# Altium PCB IrrigationStation_V2R1.PcbDoc
Units mm, origin at the board's own origin, x right, y up, seen from the top; angles counter-clockwise.
Board outline 93.47 x 97.79 mm, 2 copper layers (Top Layer, Bottom Layer); 63 components, 47 nets, 212 pads, 0 vias.
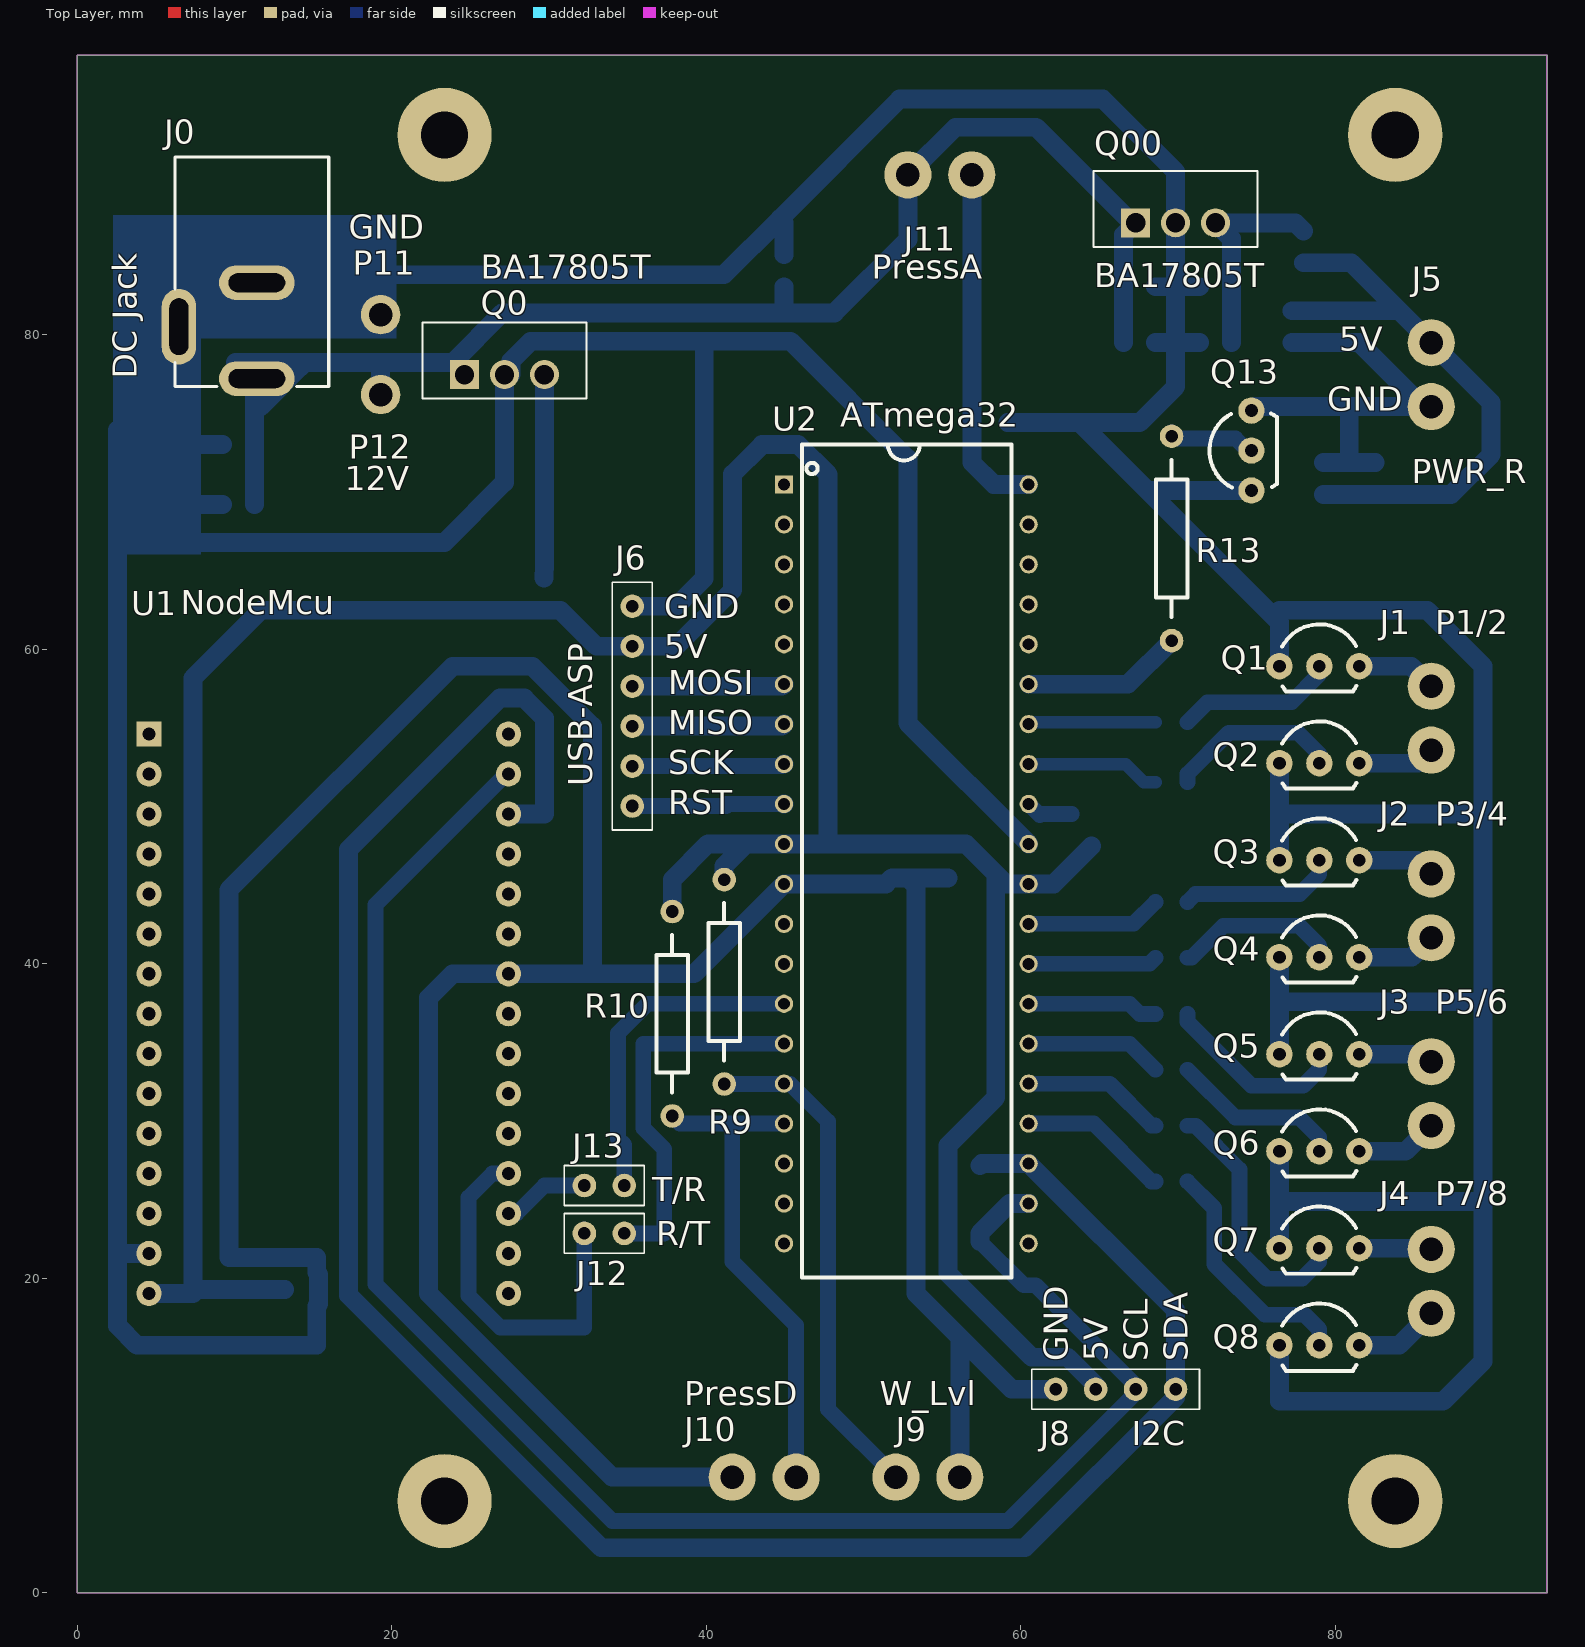
[diagram p0: Top Layer view]
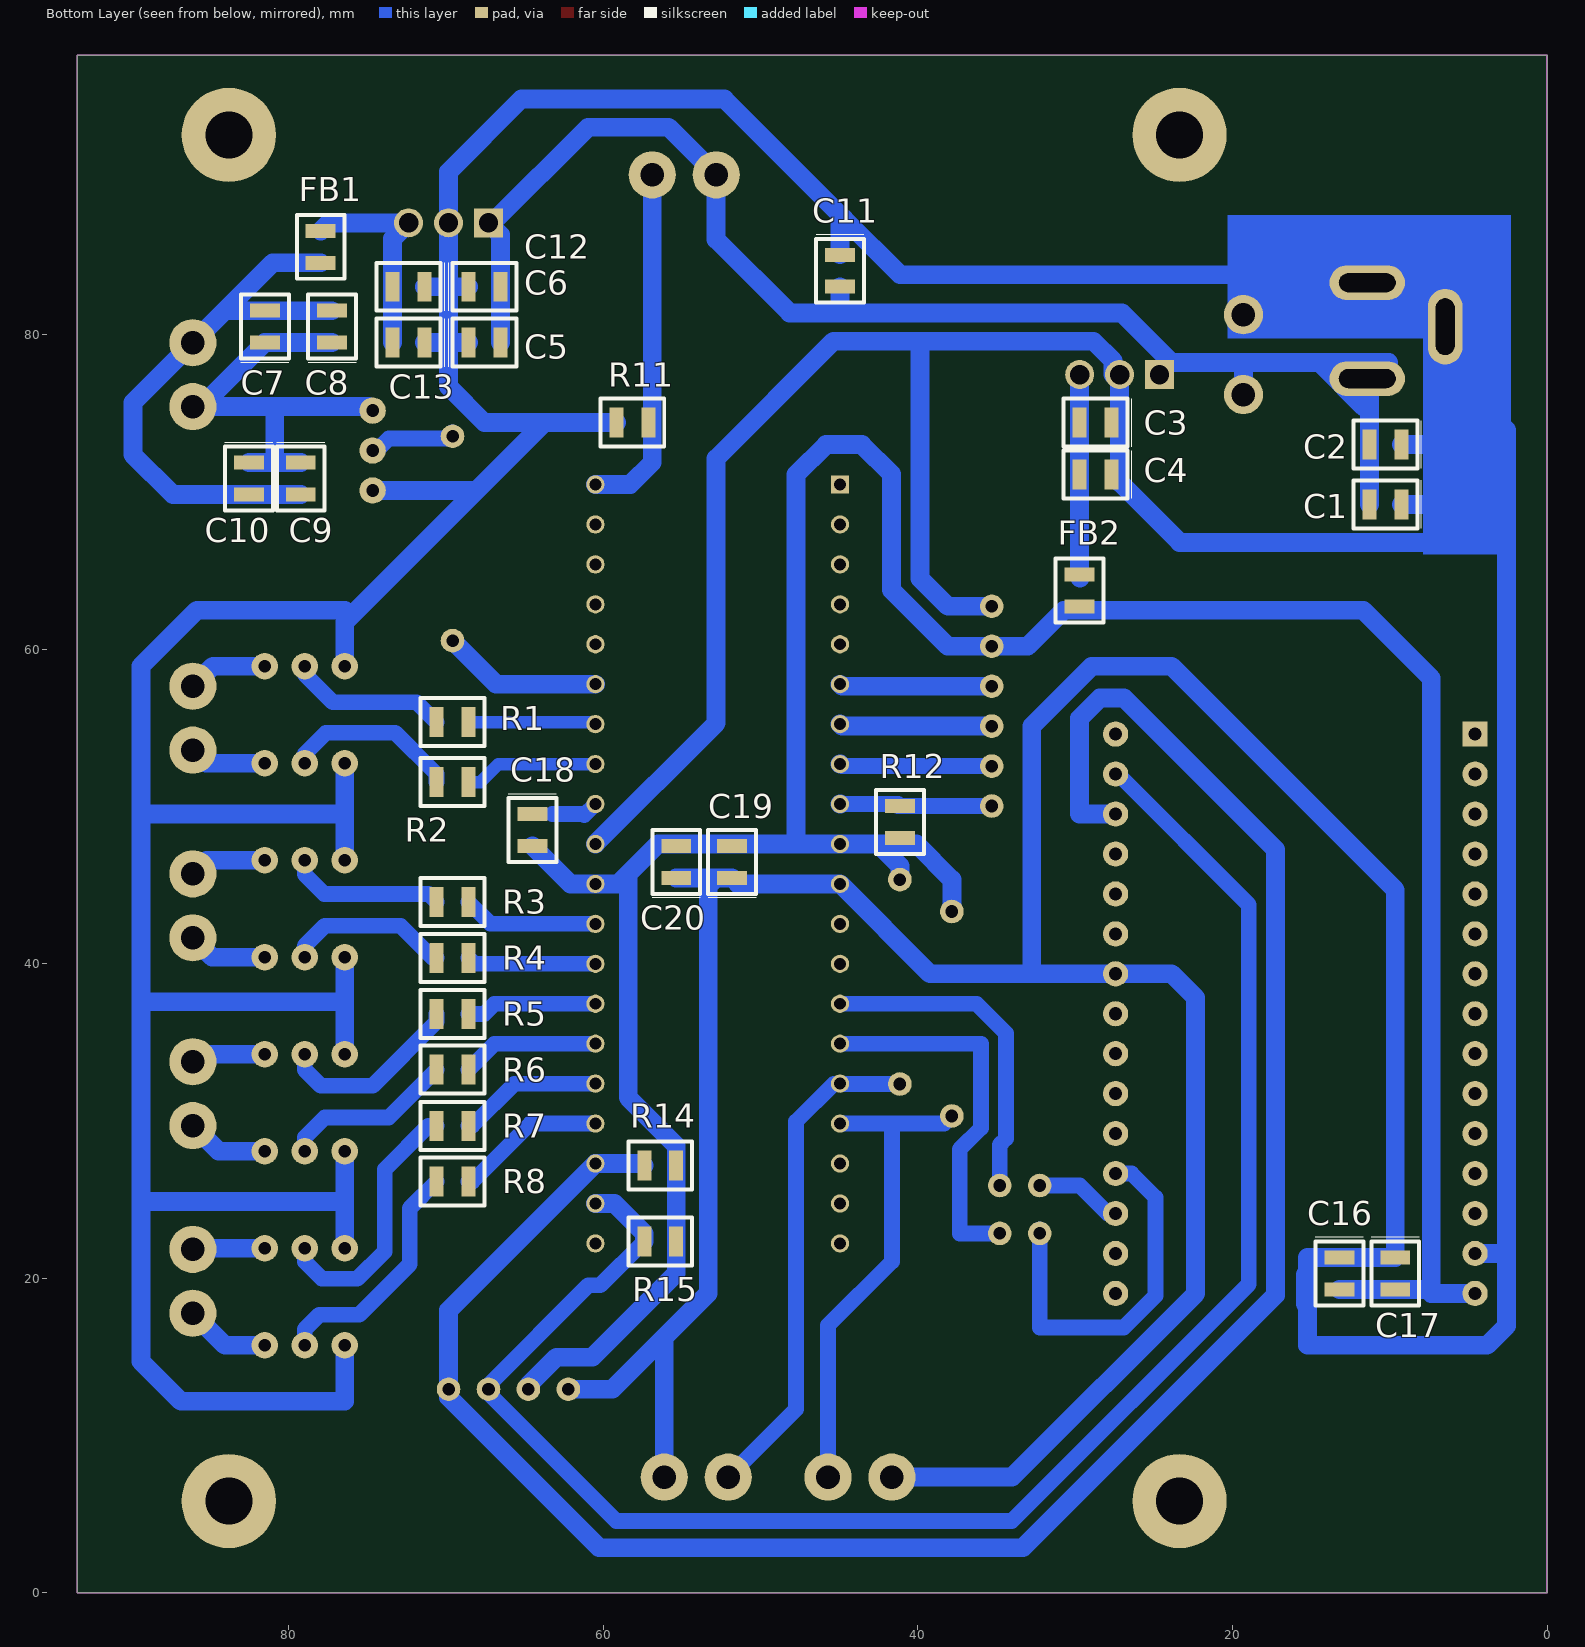
[diagram p1: Bottom Layer view, seen from below]
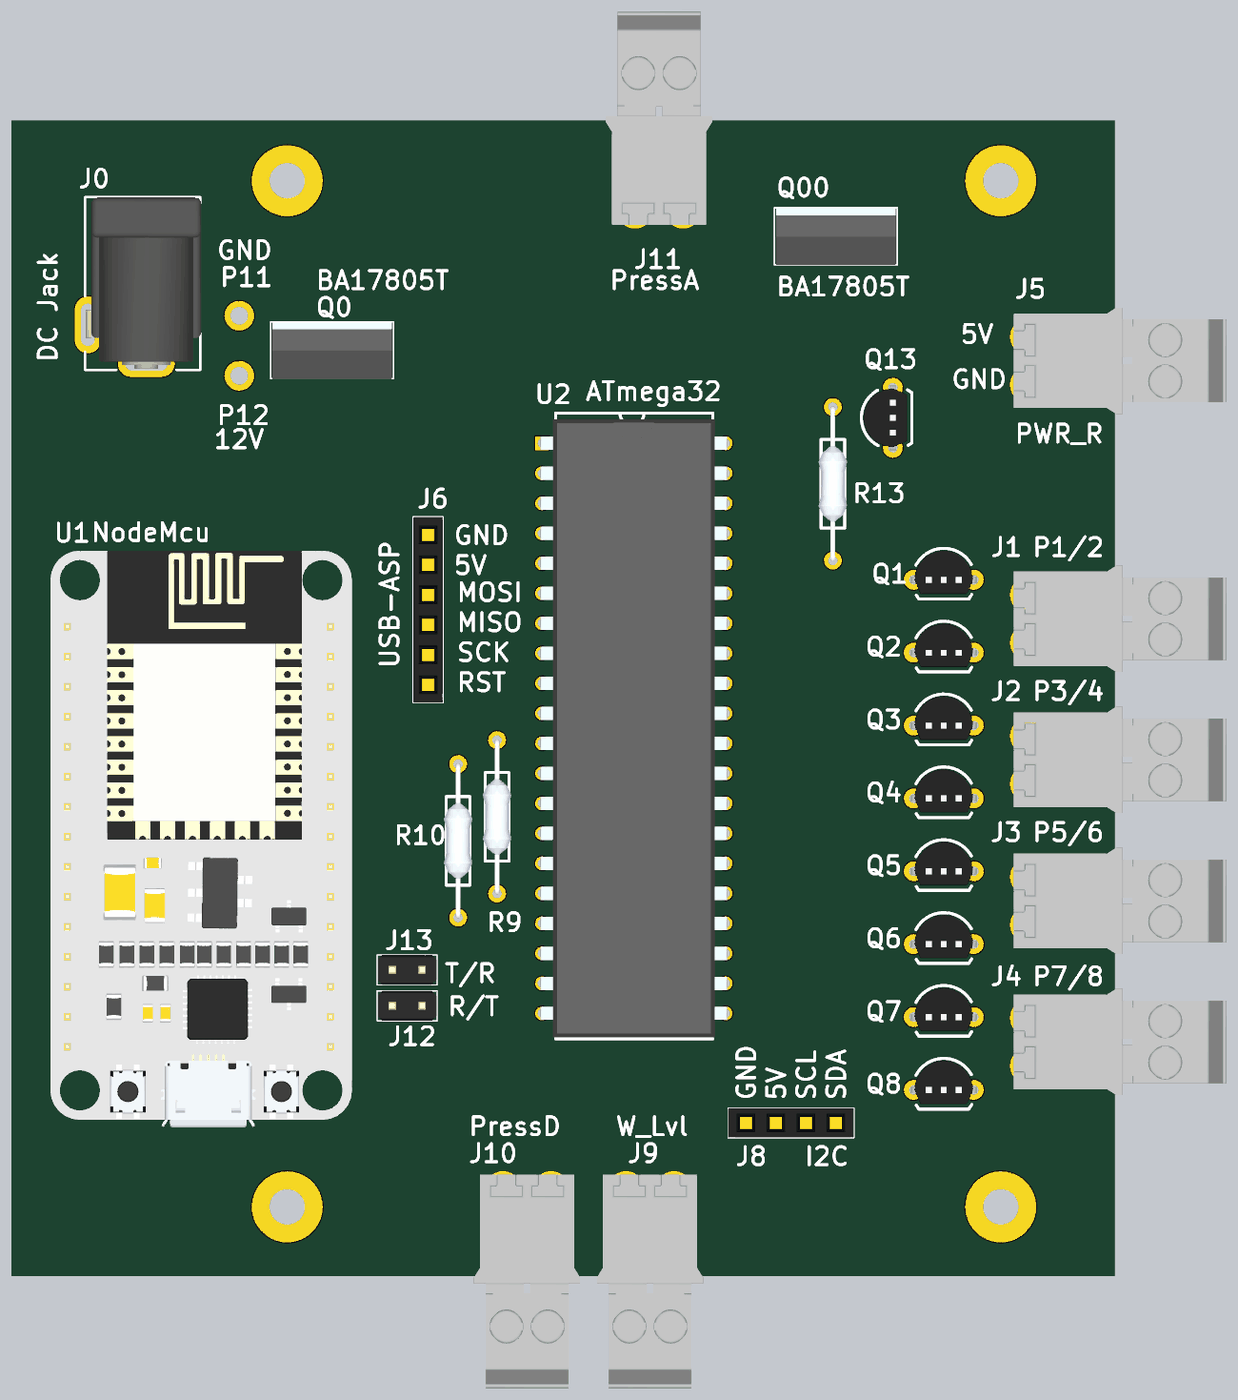
[diagram p2: 3D render of the assembled board from above, using the file's embedded part models]
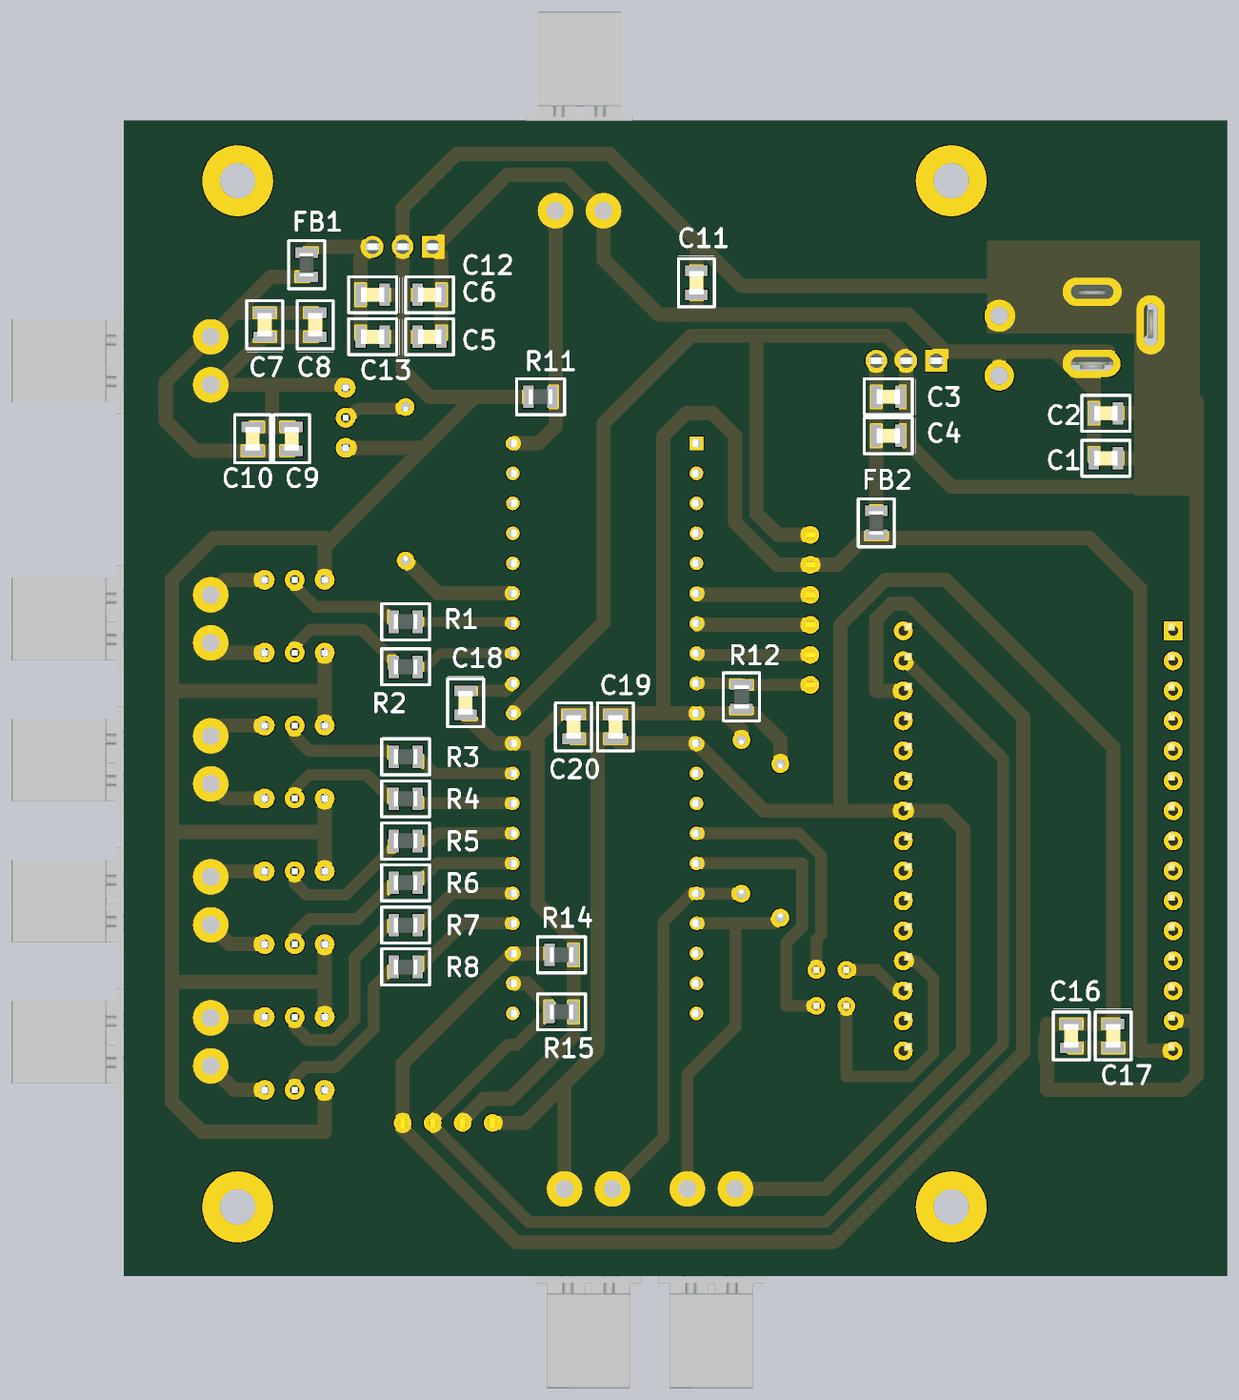
[diagram p3: 3D render of the assembled board from below, using the file's embedded part models]

## Layer stack, top to bottom
Top Solder: solder mask 0.0102, Solder Resist, Dk 3.5
Top Layer: signal copper 0.0356
Dielectric 1: dielectric 0.32, FR-4, Dk 4.8
Bottom Layer: signal copper 0.0356
Bottom Solder: solder mask 0.0102, Solder Resist, Dk 3.5

## Board outline
0,0 93.472,0 93.472,97.79 0,97.79

## Design rules (kind name [scope] priority, off if disabled: settings)
Clearance [All] p1: gap=0.6 ignorepadtopadclearanceinfootprint=TRUE except(0: Arc-Hole Track-Hole SMDPad-Hole THPad-Hole Via-Hole Fill-Hole Poly-Hole Region-Hole Text-Hole)
HoleSize [All] p1: absolutevalues=TRUE maxlimit=4 minlimit=0.5 maxpercent=80.000 minpercent=20.000
PolygonConnect [All] p1: connectstyle=Direct reliefconductorwidth=0.254 reliefentries=4 polygonreliefangle="45 Angle" airgapwidth=0.254
RoutingLayers [All] p1: top layer_v5=FALSE bottom layer_v5=TRUE
RoutingVias [All] p1: holewidth=0.711 width=1.27 viastyle="Through Hole" minholewidth=0.711 minwidth=1.27 maxholewidth=0.711 maxwidth=1.27
SolderMaskExpansion [All] p1: expansion=0.102
Width [All] p1: maxlimit=1.2 minlimit=0.6 preferedwidth=0.6
28 further rules are at their usual default settings.

## Components (designator, comment, footprint, x,y, rotation, side; value= is the part's Value field where it differs from the comment)
C1 "Capacitor - Polarized" "Capacitor - SMD - 0805 - pol" 10.274,69.215 r180 bottom value=1uF
C2 "Capacitor - Polarized" "Capacitor - SMD - 0805 - pol" 10.274,73.025 r180 bottom value=10uF
C3 "Capacitor - Polarized" "Capacitor - SMD - 0805 - pol" 28.702,74.422 r180 bottom value=10uF
C4 "Capacitor - Polarized" "Capacitor - SMD - 0805 - pol" 28.702,71.12 r180 bottom value=1uF
C5 "Capacitor - Polarized" "Capacitor - SMD - 0805 - pol" 67.564,79.502 r0 bottom value=10uF
C6 "Capacitor - Polarized" "Capacitor - SMD - 0805 - pol" 67.564,83.058 r0 bottom value=1uF
C7 "Capacitor - Polarized" "Capacitor - SMD - 0805 - pol" 81.534,80.518 r270 bottom value=10uF
C8 "Capacitor - Polarized" "Capacitor - SMD - 0805 - pol" 77.252,80.518 r270 bottom value=10uF
C9 "Capacitor - Polarized" "Capacitor - SMD - 0805 - pol" 79.248,70.866 r90 bottom value=10uF
C10 "Capacitor - Polarized" "Capacitor - SMD - 0805 - pol" 82.55,70.866 r90 bottom value=10uF
C11 "Capacitor - Polarized" "Capacitor - SMD - 0805 - pol" 44.958,84.074 r90 bottom value=1uF
C12 "Capacitor - Polarized" "Capacitor - SMD - 0805 - pol" 72.39,83.058 r180 bottom value=10uF
C13 "Capacitor - Polarized" "Capacitor - SMD - 0805 - pol" 72.39,79.502 r180 bottom value=1uF
C16 "Capacitor - Polarized" "Capacitor - SMD - 0805 - pol" 13.208,20.32 r90 bottom value=10uF
C17 "Capacitor - Polarized" "Capacitor - SMD - 0805 - pol" 9.652,20.32 r90 bottom value=1uF
C18 "Capacitor - Polarized" "Capacitor - SMD - 0805 - pol" 64.516,48.514 r90 bottom value=1uF
C19 "Capacitor - Polarized" "Capacitor - SMD - 0805 - pol" 51.816,46.482 r270 bottom value=10uF
C20 "Capacitor - Polarized" "Capacitor - SMD - 0805 - pol" 55.372,46.482 r270 bottom value=1uF
FB1 "Ferrite Bead" "Coil - SMD - 0805" 77.978,85.598 r90 bottom value=100mH
FB2 "Ferrite Bead" "Coil - SMD - 0805" 29.718,63.754 r90 bottom value=100mH
J0 "DC Jack" "DC Jack - KLDHCX" 11.176,80.645 r270 top
J1 "P1/2" "Terminal Block,2 Pos, 4mm" 86.106,55.626 r90 top
J2 "P3/4" "Terminal Block,2 Pos, 4mm" 86.106,43.688 r90 top
J3 "P5/6" "Terminal Block,2 Pos, 4mm" 86.106,31.75 r90 top
J4 "P7/8" "Terminal Block,2 Pos, 4mm" 86.106,19.812 r90 top
J5 "PWR_R" "Terminal Block,2 Pos, 4mm" 86.106,77.47 r90 top
J6 "USB-ASP" "Header Female 6 - 2.54" 35.306,62.738 r0 top
J8 "I2C" "Header Female 4 - 2.54" 69.85,12.954 r270 top
J9 "W_Lvl" "Terminal Block,2 Pos, 4mm" 54.102,7.366 r0 top
J10 "PressD" "Terminal Block,2 Pos, 4mm" 43.688,7.366 r0 top
J11 "PressA" "Terminal Block,2 Pos, 4mm" 54.864,90.17 r180 top
J12 "R/T" "Header Male 2 - 2.54" 34.798,22.86 r270 top
J13 "T/R" "Header Male 2 - 2.54" 34.798,25.908 r270 top
P11 "GND" "Pin - TH 1.5mm" 19.304,81.28 r180 top
P12 "12V" "Pin - TH 1.5mm" 19.304,76.2 r180 top
Q0 "BA17805T" TO254P480X1010X2280-3P 24.638,77.47 r0 top value=7805
Q00 "BA17805T" TO254P480X1010X2280-3P 67.31,87.122 r0 top value=7805
Q1 "P2N2222A" TO92 78.994,58.928 r0 top value=2N222
Q2 "P2N2222A" TO92 78.994,52.759 r0 top value=2N222
Q3 "P2N2222A" TO92 78.994,46.591 r0 top value=2N222
Q4 "P2N2222A" TO92 78.994,40.422 r0 top value=2N222
Q5 "P2N2222A" TO92 78.994,34.254 r0 top value=2N222
Q6 "P2N2222A" TO92 78.994,28.085 r0 top value=2N222
Q7 "P2N2222A" TO92 78.994,21.917 r0 top value=2N222
Q8 "P2N2222A" TO92 78.994,15.748 r0 top value=2N222
Q13 "P2N2222A" TO92 74.676,72.644 r90 top value=2N222
R1 "Resistor" "Resistor - SMD - 0805" 69.596,55.372 r0 bottom value=1KOhm
R2 "Resistor" "Resistor - SMD - 0805" 69.596,51.562 r0 bottom value=1KOhm
R3 "Resistor" "Resistor - SMD - 0805" 69.596,43.942 r0 bottom value=1KOhm
R4 "Resistor" "Resistor - SMD - 0805" 69.596,40.386 r0 bottom value=1KOhm
R5 "Resistor" "Resistor - SMD - 0805" 69.596,36.814 r0 bottom value=1KOhm
R6 "Resistor" "Resistor - SMD - 0805" 69.596,33.274 r0 bottom value=1KOhm
R7 "Resistor" "Resistor - SMD - 0805" 69.596,29.702 r0 bottom value=1KOhm
R8 "Resistor" "Resistor - SMD - 0805" 69.596,26.162 r0 bottom value=1KOhm
R9 "Resistor" "Resistor - TH - 12mm" 41.148,38.862 r90 top value=1KOhm
R10 "Resistor" "Resistor - TH - 12mm" 37.846,36.83 r90 top value=1KOhm
R11 "Resistor" "Resistor - SMD - 0805" 58.166,74.422 r0 bottom value=100Ohm
R12 "Resistor" "Resistor - SMD - 0805" 41.148,49.022 r90 bottom value=10KOhm
R13 "Resistor" "Resistor - TH - 12mm" 69.596,67.056 r90 top value=1KOhm
R14 "Resistor" "Resistor - SMD - 0805" 56.388,27.178 r180 bottom value=1KOhm
R15 "Resistor" "Resistor - SMD - 0805" 56.388,22.352 r180 bottom value=1KOhm
U1 "NodeMcu" DIP2286W64P254L4826H735Q30N 16.002,36.83 r0 top
U2 "ATmega32" DIP1556W56P254L5232H483Q40N 44.955,70.485 r0 top

## Footprints (in the part's own frame and the unit in brackets; to place one, negate y for a bottom-side part, rotate by r counter-clockwise, add the part's x,y. Pads: shape width x height; smd on the part's side, far side on the other; paste and mask are expansions set on the pad)
"Capacitor - SMD - 0805 - pol" [mil] "SMD capacitor - 0805"
  rect 35x75 smd: 1(-40,0) 2(40,0)
  silkscreen extent -80,-60 90,60, body extent -39,-25 39,25, height 32
"Coil - SMD - 0805" [mil] "SMD coil - 0805"
  rect 35x75 smd: 1(-40,0) 2(40,0)
  silkscreen extent -80,-60 80,60, body extent -39,-23 39,24, height 35
"DC Jack - KLDHCX" [mm]
  oval 2.2x4.8 hole 1.2 slot 3.6 at 90 deg: 1(3.429,0.254) 2(-2.667,0.254)
  oval 4.8x2.2 hole 1.2 slot 3.6 at 0 deg: 3(0.127,-4.699)
  silkscreen extent -10.67,-4.95 3.94,4.83, body extent -10.65,-4.9 3.85,4.9, height 11
DIP1556W56P254L5232H483Q40N [mil]
  rect 45.63x45.63 hole 29.88: 1(0,0)
  round 45.63 hole 29.88: 2(0,-100) 3(0,-200) 4(0,-300) 5(0,-400) 6(0,-500) 7(0,-600) 8(0,-700) 9(0,-800) 10(0,-900) 11(0,-1000) 12(0,-1100) 13(0,-1200) 14(0,-1300) 15(0,-1400) 16(0,-1500) 17(0,-1600) 18(0,-1700) 19(0,-1800) 20(0,-1900) 21(612.52,-1900) 22(612.52,-1800) 23(612.52,-1700) 24(612.52,-1600) 25(612.52,-1500) 26(612.52,-1400) 27(612.52,-1300) 28(612.52,-1200) 29(612.52,-1100) 30(612.52,-1000) 31(612.52,-900) 32(612.52,-800) 33(612.52,-700) 34(612.52,-600) 35(612.52,-500) 36(612.52,-400) 37(612.52,-300) 38(612.52,-200) 39(612.52,-100) 40(612.52,0)
  silkscreen extent 45,-1985 570,100, body extent -5,-1980 618,80, height 190
DIP2286W64P254L4826H735Q30N [mm]
  rect 1.6x1.6 hole 0.835: 1(-11.43,17.78)
  round 1.6 hole 0.835: 2(-11.43,15.24) 3(-11.43,12.7) 4(-11.43,10.16) 5(-11.43,7.62) 6(-11.43,5.08) 7(-11.43,2.54) 8(-11.43,0) 9(-11.43,-2.54) 10(-11.43,-5.08) 11(-11.43,-7.62) 12(-11.43,-10.16) 13(-11.43,-12.7) 14(-11.43,-15.24) 15(-11.43,-17.78) 16(11.43,-17.78) 17(11.43,-15.24) 18(11.43,-12.7) 19(11.43,-10.16) 20(11.43,-7.62) 21(11.43,-5.08) 22(11.43,-2.54) 23(11.43,0) 24(11.43,2.54) 25(11.43,5.08) 26(11.43,7.62) 27(11.43,10.16) 28(11.43,12.7) 29(11.43,15.24) 30(11.43,17.78)
  body extent -12.7,-24.25 12.85,24.57, height 12.85
"Header Female 4 - 2.54" [mm] "header - 4 pin - pitch 2.54mm"
  round 1.5 hole 0.8: 1(0,0) 2(0,-2.54) 3(0,-5.08) 4(0,-7.62)
  silkscreen extent -1.27,-9.14 1.27,1.52, body extent -1.25,-9.14 1.25,1.52, height 5
"Header Female 6 - 2.54" [mm] "header - 6 pin - pitch 2.54mm"
  round 1.5 hole 0.8: 1(0,0) 2(0,-2.54) 3(0,-5.08) 4(0,-7.62) 5(0,-10.16) 6(0,-12.7)
  silkscreen extent -1.27,-14.22 1.27,1.52, body extent -1.25,-14.22 1.25,1.52, height 5
"Header Male 2 - 2.54" [mm] "header - 2 pin - pitch 2.54mm"
  round 1.5 hole 0.8: 1(0,0) 2(0,-2.54)
  silkscreen extent -1.27,-3.81 1.27,1.27, body extent -1.27,-3.77 1.28,1.23, height 10.54
"Pin - TH 1.5mm" [mm] "Through-hole pin - 1.5mm"
  round 2.5 hole 1.5: 1(0,0)
"Resistor - SMD - 0805" [mil] "SMD resistor - 0805"
  rect 35x75 smd: 1(-40,0) 2(40,0)
  silkscreen extent -80,-60 80,60, body extent -39,-25 39,25, height 20
"Resistor - TH - 12mm" [mm] "Through-hole resistor 12mm/0.8mm"
  round 1.5 hole 0.8: 1(-6.5,0) 2(6.5,0)
  silkscreen extent -5,-1 5,1, body extent -6.55,-1.2 6.55,1.2, height 3.9
"Terminal Block,2 Pos, 4mm" [mm] "Terminal Block,2 Pos, 4mm"
  round 3 hole 1.5 paste+0 mask+0: 1(2.032,0) 2(-2.032,0)
  body extent -4.5,-16.85 4.5,1.2, height 8.8
TO92 [mil]
  round 66 hole 32: 1(-100,0) 2(0,0) 3(100,0)
  silkscreen extent -93,-64 93,105, body extent -110,-47 110,98, height 316
TO254P480X1010X2280-3P [mm]
  rect 1.845x1.845 hole 1.23: 1(0,0)
  round 1.845 hole 1.23: 2(2.54,0) 3(5.08,0)
  silkscreen extent -2.67,-1.52 7.75,3.3, body extent -2.51,-1.55 7.59,3.25, height 22.1

## Part data
C1 C2 C3 C4 C5 C6 C7 C8 C9 C10 C11 C12 C13 C16 C17 C18 C19 C20: "Generic Polarized Capacitor"
FB1 FB2: "Generic Ferrite Bead"
J1 J2 J3 J4 J5 J9 J10 J11: library part "TERM BLOCK PLUG 2POS", "2 Position Terminal Block Plug, Female Sockets 180° Free Hanging (In-Line)"
J6: library part "Header 6", "Header - 6 pins"
J8: library part "Header 4", "Header - 4 pins"
J12 J13: library part "Header 2", "Header - 2 pins"
P11 P12: library part Pin, "Single Pin"
Q0 Q00: "Voltage Regulator"
Q1 Q2 Q3 Q4 Q5 Q6 Q7 Q8 Q13: "Transitor - BJT - NPN 40V 600mA 300 MHz 625mW - TO-92-3"
R1 R2 R3 R4 R5 R6 R7 R8 R9 R10 R11 R12 R13 R14 R15: "Generic Resistor"
U1: "ESP32 NodeMCU"
U2: library part ATMEGA32-16PU, "AVR ATmega Microcontroller IC 8-Bit 16MHz 32KB _16K x 16_ FLASH 40-PDIP"

## Free pads (board coordinates)
  round 6 hole 3: FX(23.368,5.842) FX(23.368,92.71) FX(83.82,5.842) FX(83.82,92.71)

## Nets (pads, with @x,y where several pads share a name; then routed paths per layer and width w, separated by ;. In a path a pad name is that pad's centre, name@x,y a point inside that pad or via, vN(x,y) a via of type N, cw(c..) or ccw(c..) an arc to the next point about the centre after c; other vN are vias at no path point)
5V_R: C7.1 C8.1 C9.1 C10.1 FB1.1 J5.1 | length 37.5
  Bottom Layer w1.2: C8.1 C7.1 84.074,81.534 ; FB1.1 81.026,84.582 84.074,81.534 ; C9.1 C10.1 87.376,69.85 89.916,72.39 89.916,75.692 J5.1 84.074,81.534
5V_u: C16.1 C17.1 C18.1 C19.1 C20.1 FB2.1 J6.2 J8.3 R9.2 R10.2 R12.1 R14.2 R15.2 U1.15 U2.10 U2.30 | length 198.5
  Bottom Layer w1.2: U1.15 7.366,19.05 ; C16.1 C17.1 7.62,19.304 7.366,19.05 ; R10.2 37.846,45.362 40.109,47.625 U2.10 47.752,47.625 ; R9.2 41.148,46.228 42.418,47.498 ; C18.1 62.103,45.085 U2.30 59.055,45.085 58.42,45.72 ; J8.3 64.77,13.208 62.992,14.986 60.706,14.986 55.372,20.32 R15.2 R14.2 55.372,28.448 58.42,31.496 58.42,45.72 ; 7.366,19.05 7.366,58.166 11.684,62.484 30.734,62.484 33.02,60.198 J6.2 38.106,60.198 41.678,63.77 41.678,71.142 43.561,73.025 45.847,73.025 47.752,71.12 47.752,47.625 ; 47.752,47.625 56.515,47.625 58.42,45.72
12V: C1.1 C2.1 C5.1 C6.1 C11.1 J0.1 J11.1 P12.1 Q00.1 Q0.1 | length 93.1
  Bottom Layer w1.2: J0.1@10.068,78.232 J0.1@12.192,78.232 ; C1.1 C2.1 11.29,77.33 J0.1@12.192,78.232 ; 11.684,75.438 14.202,77.956 ; P12.1 19.304,78.232 ; C11.1 44.958,81.647 45.212,81.393 ; C5.1 C6.1 66.548,86.36 Q00.1 67.056,87.122 60.982,93.196 55.858,93.196 J11.1 52.832,86.062 48.163,81.393 45.212,81.393 ; J0.1@12.192,78.232 19.304,78.232 ; 19.304,78.232 23.876,78.232 27.037,81.393 45.212,81.393
\R\e\s\e\t: J6.6 R12.2 U2.9 | length 9.8
  Bottom Layer w1: J6.6 R12.2 41.275,50.038 41.275,50.165 U2.9@44.938,50.165
  Bottom Layer w1.2: U2.9@44.938,50.165 U2.9
ARef: C18.2 U2.32 | length 3.1
  Bottom Layer w1: U2.32 61.214,49.464 61.214,49.53 63.246,49.53
GND: C1.2 C2.2 C3.2 C4.2 C5.2 C6.2 C11.2 C12.2 C13.2 C16.2 C17.2 C19.2 C20.2 J0.2 J0.3 J6.1 J8.4 J9.1 J10.2 P11.1 Q00.2 Q0.2 Q1.1 Q2.1 Q3.1 Q4.1 Q5.1 Q6.1 Q7.1 Q8.1 Q13.1 R11.2 U1.14 U1.24 U2.11 U2.31 | length 664.6
  Bottom Layer w1.2: U1.14 2.826,21.59 2.572,21.336 ; J0.3 6.477,77.851 ; C1.2 6.604,69.215 6.477,69.342 ; C2.2 6.604,73.025 6.477,73.152 ; J0.2@10.668,83.312 J0.2 J0.2@11.43,82.804 ; 18.415,82.169 20.066,83.82 41.132,83.82 44.704,87.392 ; J6.1 38.1,62.738 39.878,64.516 39.878,79.593 ; J10.2 34.025,7.366 22.352,19.039 22.352,37.846 23.876,39.37 U1.24 32.766,39.37 ; C11.2 44.958,87.138 44.704,87.392 ; C20.2 52.832,45.466 ; J9.1 56.134,16.25 ; R11.2 63.754,74.422 ; U2.31 52.832,55.306 52.832,72.136 45.375,79.593 39.878,79.593 ; J8.4@61.976,12.954 59.43,12.954 56.134,16.25 ; 68.326,70.104 72.136,70.104 Q13.1 ; C5.2 69.85,79.502 ; C6.2 69.85,83.058 ; C13.2 69.85,79.502 ; C12.2 69.85,83.058 ; Q8.1 76.454,12.192 86.868,12.192 89.408,14.732 89.408,25.146 ; Q7.1 76.454,24.892 ; Q6.1 76.454,24.892 ; Q5.1 76.454,37.592 ; Q4.1 76.454,37.592 ; Q3.1 76.454,49.53 ; Q2.1 76.454,49.53 ; Q1.1 76.454,61.722 63.754,74.422 ; 76.454,62.484 85.852,62.484 89.408,58.928 89.408,49.53 ; 2.572,21.336 2.572,16.986 3.81,15.748 15.24,15.748 15.24,18.242 15.361,18.362 15.361,20.246 15.24,20.366 15.24,21.336 C16.2 C17.2 9.652,44.704 23.876,58.928 28.956,58.928 32.766,55.118 32.766,39.37 ; 2.572,21.336 2.572,73.946 6.477,77.851 ; 6.477,69.342 6.477,67.945 7.62,66.802 23.368,66.802 27.178,70.612 Q0.2 27.596,77.47 27.596,78.349 28.839,79.593 39.878,79.593 ; 6.477,69.342 6.477,73.152 ; 6.477,73.152 6.477,77.851 ; 32.766,39.37 39.24,39.37 U2.11 51.435,45.085 C19.2 52.832,45.466 ; 44.704,87.392 52.308,94.996 65.222,94.996 69.85,90.368 Q00.2 69.85,83.058 ; 52.832,45.466 53.34,44.958 53.34,19.044 56.134,16.25 ; 63.754,74.422 67.564,74.422 69.85,76.708 69.85,79.502 ; 69.85,79.502 69.85,83.058 ; 76.454,24.892 89.154,24.892 89.408,25.146 ; 76.454,37.592 89.408,37.592 ; 76.454,49.53 89.408,49.53 ; 89.408,25.146 89.408,37.592 ; 89.408,37.592 89.408,49.53
GND_R: C7.2 C8.2 C9.2 C10.2 J5.2 Q13.3 | length 28.5
  Bottom Layer w1.2: Q13.3 74.93,75.438 81.026,75.438 ; C8.2 C7.2 J5.2@85.598,75.438 ; C9.2 80.899,71.882 ; C10.2 80.899,71.882 ; J5.2 J5.2@85.598,75.438 ; 80.899,71.882 80.899,75.311 81.026,75.438 ; 81.026,75.438 J5.2@85.598,75.438
GND_R-control: R13.1 U2.35 | length 10.2
  Bottom Layer w1.2: U2.35 66.825,57.785 R13.1
GND_R_control: Q13.2 R13.2 | length 5.6
  Bottom Layer w1: R13.2@69.596,73.81 70,73.406 73.66,73.406 74.422,72.644 Q13.2
MasterRX: J12.2 U1.19 | length 23.8
  Bottom Layer w1: U1.19 26.422,26.67 24.892,25.14 24.892,18.903 26.91,16.885 32.258,16.885 J12.2 J12.2@32.258,23.114
MasterTX: J13.2 U1.18 | length 5.6
  Bottom Layer w1: U1.18 27.94,24.13 29.718,25.908 J13.2
MISO: J6.4 U2.7 | length 9.7
  Bottom Layer w1.2: J6.4 44.828,55.118 U2.7 U2.7@44.949,55.245
MOSI: J6.3 U2.6 | length 9.7
  Bottom Layer w1.2: J6.3 44.828,57.658 U2.6
NetC3_1: C3.1 C4.1 FB2.2 Q0.3 | length 12.9
  Bottom Layer w1.2: FB2.2@29.69,64.769 FB2.2@29.696,64.547 ; FB2.2@29.703,64.77 29.703,64.778 29.703,64.786 29.704,64.793 29.704,64.801 29.718,65.278 C4.1 ; C4.1 C3.1 Q0.3
NetC12_1: C12.1 C13.1 FB1.2 Q00.3 | length 13.8
  Bottom Layer w1.2: C13.1 C12.1 73.406,86.106 Q00.3 77.47,87.122 FB1.2
P1-control: R1.1 U2.34 | length 8.1
  Bottom Layer w0.8: U2.34 60.64,55.372 R1.1
P1-SSR: J1.1 Q1.3 | length 5.1
  Bottom Layer w1.2: Q1.3 84.836,58.928 J1.1
P1_control: Q1.2 R1.2 | length 10.2
  Bottom Layer w1: R1.2 71.882,56.642 77.216,56.642 78.994,58.42 Q1.2
P2-control: R2.1 U2.33 | length 8.5
  Bottom Layer w0.8: U2.33 66.675,52.705 67.818,51.562 R2.1
P2-SSR: J1.2 Q2.3 | length 4.9
  Bottom Layer w1.2: Q2.3 85.271,52.759 J1.2
P2_control: Q2.2 R2.2 | length 11.1
  Bottom Layer w1: R2.2 70.612,52.07 73.24,54.698 77.636,54.698 78.994,53.34 Q2.2
P3-control: R3.1 U2.29 | length 8.6
  Bottom Layer w1: U2.29 67.183,42.545 R3.1
P3-SSR: J2.1 Q3.3 | length 4.9
  Bottom Layer w1.2: Q3.3 85.235,46.591 J2.1
P3_control: Q3.2 R3.2 | length 10
  Bottom Layer w1: R3.2 71.12,44.45 77.753,44.45 78.994,45.691 Q3.2
P4-control: R4.1 U2.28 | length 8.2
  Bottom Layer w1: U2.28 68.199,40.005 R4.1
P4-SSR: J2.2 Q4.3 | length 5.1
  Bottom Layer w1.2: Q4.3 84.872,40.422 J2.2
P4_control: Q4.2 R4.2 | length 10.5
  Bottom Layer w1: R4.2 70.866,40.386 72.898,42.418 77.724,42.418 78.994,41.148 Q4.2
P5-control: R5.1 U2.27 | length 8.3
  Bottom Layer w1: U2.27 66.929,37.465 67.58,36.814 R5.1
P5-SSR: J3.1 Q5.3 | length 4.8
  Bottom Layer w1.2: Q5.3 85.634,34.254 J3.1
P5_control: Q5.2 R5.2 | length 12
  Bottom Layer w1: R5.2 70.612,36.322 74.676,32.258 77.978,32.258 78.994,33.274 Q5.2
P6-control: R6.1 U2.26 | length 8.8
  Bottom Layer w1: U2.26 66.929,34.925 R6.1
P6-SSR: J3.2 Q6.3 | length 5.2
  Bottom Layer w1.2: Q6.3 84.473,28.085 J3.2
P6_control: Q6.2 R6.2 | length 11
  Bottom Layer w1: R6.2 73.66,30.226 77.724,30.226 78.994,28.956 Q6.2
P7-control: R7.1 U2.25 | length 9.2
  Bottom Layer w1: U2.25 65.659,32.385 68.326,29.718 68.564,29.718 R7.1
P7-SSR: J4.1 Q7.3 | length 4.6
  Bottom Layer w1.2: Q7.3 86.033,21.917 J4.1
P7_control: Q7.2 R7.2 | length 16.8
  Bottom Layer w1: R7.2 71.136,29.702 73.914,26.924 73.914,21.716 75.651,19.978 77.89,19.978 78.994,21.082 Q7.2
P8-control: R8.1 U2.24 | length 9.6
  Bottom Layer w1: U2.24 64.643,29.845 68.326,26.162 R8.1
P8-SSR: J4.2 Q8.3 | length 5.4
  Bottom Layer w1.2: Q8.3 84.074,15.748 J4.2
P8_control: Q8.2 R8.2 | length 15.4
  Bottom Layer w1: R8.2 72.314,24.46 72.314,20.904 75.532,17.686 78.072,17.686 78.994,16.764 Q8.2
PressureA: J11.2 R11.1 U2.40 | length 22.5
  Bottom Layer w1.2: J11.2 56.896,71.882 58.293,70.485 U2.40
PressureD: J10.1 R10.1 U2.17 | length 31.5
  Bottom Layer w1: R10.1 38.331,29.845 41.783,29.845 ; U2.17 41.783,29.845 ; J10.1 45.72,17.018 41.656,21.082 41.656,29.718 41.783,29.845
SCK: J6.5 U2.8 | length 9.7
  Bottom Layer w1: J6.5 44.828,52.578 U2.8
  Bottom Layer w1.2: U2.8@44.944,52.705 U2.8
SCL: J8.2 R15.1 U1.29 U2.22 | length 112.6
  Bottom Layer w1: U1.29 27.285,52.07 18.972,43.757 18.972,19.636 34.036,4.572 59.182,4.572 67.31,12.7 J8.2 67.31,13.208 60.96,19.558 60.198,19.558 R15.1
  Bottom Layer w1.2: R15.1 57.404,22.86 59.309,24.765 U2.22
SDA: J8.1 R14.1 U1.28 U2.23 | length 138.8
  Bottom Layer w1.2: U1.28 29.718,49.53 29.718,55.62 28.442,56.896 26.89,56.896 17.272,47.278 17.272,18.932 33.332,2.872 60.276,2.872 69.85,12.446 J8.1 69.85,17.974 60.519,27.305 U2.23 57.531,27.305 R14.1
SlaveRX: J13.1 U2.14 | length 21.2
  Bottom Layer w1: J13.1 34.798,28.499 34.396,28.901 34.396,35.588 36.273,37.465 U2.14
SlaveTX: J12.1 U2.15 | length 24.1
  Bottom Layer w1: J12.1 37.338,22.86 37.338,28.222 35.996,29.564 35.996,34.925 U2.15
WaterLevel: J9.2 R9.1 U2.16 | length 32
  Bottom Layer w1: R9.1 44.932,32.362 U2.16 45.339,32.385 47.752,29.972 47.752,11.684 J9.2
pads on no net: U1.1 U1.2 U1.3 U1.4 U1.5 U1.6 U1.7 U1.8 U1.9 U1.10 U1.11 U1.12 U1.13 U1.16 U1.17 U1.20 U1.21 U1.22 U1.23 U1.25 U1.26 U1.27 U1.30 U2.1 U2.2 U2.3 U2.4 U2.5 U2.12 U2.13 U2.18 U2.19 U2.20 U2.21 U2.36 U2.37 U2.38 U2.39

## Keep-outs
Keep-Out Layer:
  the board outline again, w0.1

## Other copper
Bottom Layer:
  rectangle net GND: 5.334,79.756 20.32,87.63
  rectangle net GND: 2.286,66.04 7.874,87.63

## Silkscreen, mask and mechanical layers (free items; w line width, h text height)
Top Overlay:
  text "5V" at 80.264,78.994 h1.52
  text "GND" at 79.502,75.184 h1.52
  text "GND" at 37.338,61.976 h1.52
  text "5V" at 37.338,59.436 h1.52
  text "MOSI" at 37.592,57.15 h1.52
  text "MISO" at 37.592,54.61 h1.52
  text "SCK" at 37.592,52.07 h1.52
  text "RST" at 37.592,49.53 h1.52
  text "GND" at 62.992,14.732 h1.52 r90
  text "5V" at 65.532,14.732 h1.52 r90
  text "SCL" at 68.072,14.732 h1.52 r90
  text "SDA" at 70.612,14.732 h1.52 r90